# Allegro board laser_driver2.brd
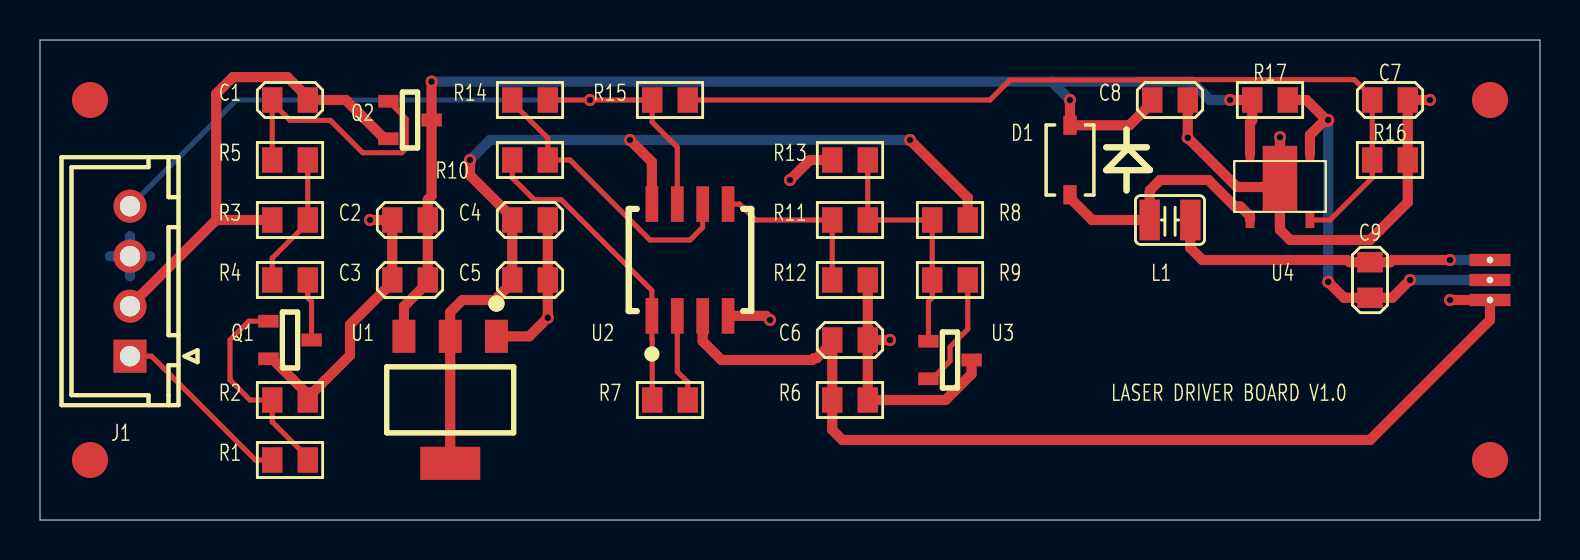
[diagram p0: board, top side]
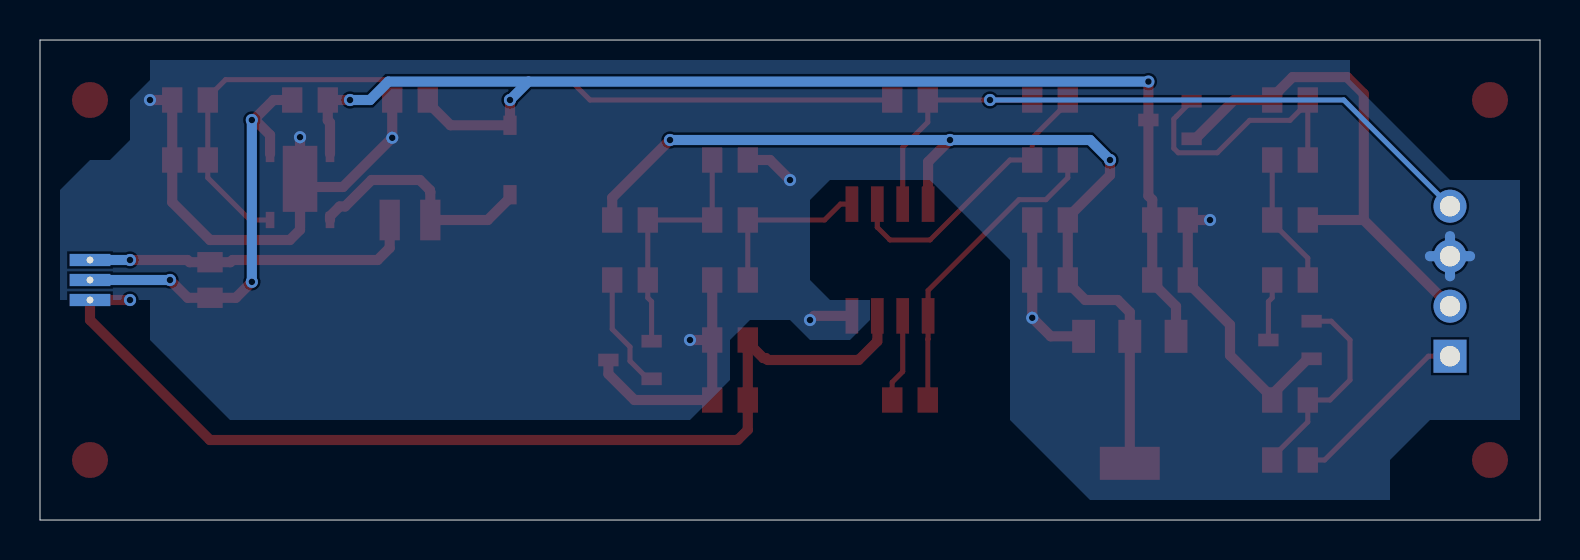
[diagram p1: board, bottom side, seen from below]

Outline 75 x 24 mm; copper layers: TOP, BOTTOM. Coordinates in mm from the lower left corner of the outline.
Outline path: 0,24 75,24 75,0 0,0 0,24

## Design rules (mm)
nets with their own width: min track width 0.508; nets 5V COM GND LD- PD+ VCC VIN

## Placement (name value [footprint] x y rotation side)
C1  0.1uF  [C0805]  12.5 21 180 top
C2  10uF  [C0805]  18.5 15 180 top
C3  0.1uF  [C0805]  18.5 12 180 top
C4  10uF  [C0805]  24.5 15 0 top
C5  0.1uF  [C0805]  24.5 12 0 top
C6  10pF  [C0805]  40.5 9 0 top
C7  0.1uF  [C0805]  67.5 21 0 top
C8  4.7uF  [C0805]  56.5 21 0 top
C9  1uF  [C0805]  66.5 12 270 top
D1  SS14  [SOD-123]  51.5 18 90 top
J1  HEADER 4  [WAFER1X4-2_54MM]  4.5 8.19 90 top
J2  HEADER 3  [LASER]  72.5 13 270 top
L1  27uH  [L1008]  56.5 15 0 top
NOREF  -  []  2.5 21 0 top
NOREF#2  -  []  72.5 21 0 top
NOREF#3  -  []  2.5 3 0 top
NOREF#4  -  []  72.5 3 0 top
Q1  MMBT3904  [SOT-23]  12.5 9 270 top
Q2  AO3401  [SOT-23]  18.5 20 270 top
R1  10K 1%  [R0805]  12.5 3 0 top
R2  10K 1%  [R0805]  12.5 6 0 top
R3  33K 1%  [R0805]  12.5 15 0 top
R4  6K8 1%  [R0805]  12.5 12 0 top
R5  100K 1%  [R0805]  12.5 18 180 top
R6  1M 1%  [R0805]  40.5 6 180 top
R7  0R  [R0805]  31.5 6 180 top
R8  250R 1%  [R0805]  45.5 15 180 top
R9  0R 1%  [R0805]  45.5 12 0 top
R10  10K 1%  [R0805]  24.5 18 0 top
R11  10K 1%  [R0805]  40.5 15 180 top
R12  10K 1%  [R0805]  40.5 12 0 top
R13  NC  [R0805]  40.5 18 180 top
R14  10K 1%  [R0805]  24.5 21 0 top
R15  1K 1%  [R0805]  31.5 21 0 top
R16  1M 1%  [R0805]  67.5 18 0 top
R17  1R 0.1%  [R0805]  61.5 21 0 top
U1  AMS1117-5  [SOT223]  20.5 6 180 top
U2  AD8606AR  [SOP8_244_0500_069]  32.5 13 90 top
U3  TL431ACDBZR  [SOT-23]  45.5 8 270 top
U4  MT7201C  [SOT89-5]  60.5 15 90 top

## Library data of the parts
C1-C9 = C_Generic
D1 = DIODE SCHOTTKY_0
J1 = HEADER 4: Tolerance: #TOL; User Part Number: HAMP
J2 = HEADER 3
L1 = L_2.2uH-1.48A_CMS
Q1 = NPN_0
Q2 = TM3401
R1-R16 = R_Generic: tolerance: 1%
R17 = R_Generic: tolerance: 0.1%
U1 = AS1117: Tolerance: #TOL; User Part Number: HAMP
U2 = AD8032ARZ
U3 = TL431
U4 = MT7201C

## Footprints (pads in the part's own frame, mm; a bottom-side part is the same pattern mirrored in y, then rotated)
C0805
  rect 1.016x1.27 smd: 1(-0.889,0) 2(0.889,0)
L1008
  rect 1.016x2.032 smd: 1(-1.016,0) 2(1.016,0)
LASER
  rect 0.61x2.032 hole 0.33: 1(0,0) 2(1,0) 3(2,0)
R0805
  rect 1.016x1.27 smd: 1(-0.889,0) 2(0.889,0)
SOD-123
  rect 0.965x0.66 smd: 1(1.738,0) 2(-1.738,0)
SOP8_244_0500_069
  rect 1.778x0.635 smd: 1(-2.794,1.905) 2(-2.794,0.635) 3(-2.794,-0.635) 4(-2.794,-1.905) 5(2.794,-1.905) 6(2.794,-0.635) 7(2.794,0.635) 8(2.794,1.905)
SOT89-5
  rect 0.813x0.432 smd: 1(0,0) 3(0,-2.997) 4(3.302,-2.997) 5(3.302,0)
  custom 4.115x1.727 smd: 2(1.651,-1.499)
SOT223
  rect 1.143x1.651 smd: 1(-2.321,-3.184) 2(-0.01,-3.184) 3(2.301,-3.184)
  rect 2.997x1.651 smd: 4(-0.01,3.166)
SOT-23
  rect 0.635x1.016 smd: 1(-0.94,-1.079) 2(0.94,-1.079) 3(0,1.079)
WAFER1X4-2_54MM
  rect 1.651x1.651 hole 1.016: 1(0,0)
  round 1.651 hole 1.016: 2(2.5,0) 3(5,0) 4(7.5,0)

## Nets
5V: C4.1 C5.1 R8.1 U1.2(OUT1) U1.4(OUT2) U2.8(+VS)
GND: C2.2 C3.2 C4.2 C5.2 C6.2 C7.2 C8.2 J1.3 Q1.2 R2.2 R6.1 R12.2 R13.2 R16.2 U1.1(ADJ/GND) U2.4(-VS) U3.3(ANODE) U4.2(GND)
VCC: C2.1 C3.1 C8.1 D1.1(ANODE) Q2.3(DRAIN) R17.1 U1.3(IN) U4.5(VIN)
VIN: C1.1 J1.2 Q2.2(SOURCE) R3.1
ADJ: J1.4 R14.2 R15.1 U2.7(OUT2)
COM: C9.2 J2.2 R17.2 U4.4(ISENSE)
EN: J1.1 R1.1
LD-: C9.1 J2.1 L1.2
PD+: C6.1 J2.3 R6.2 U2.3(+IN1)
VREF: R8.2 R9.1 R11.1 R13.1 U3.1(REF)
N00162: D1.2(CATHODE) L1.1 U4.1(LX)
N01015: C7.1 R15.2 R16.1 U4.3(ADJ)
N04030: R7.2 R10.1 U2.1(OUT1)
N04088: R7.1 U2.2(-N1)
N05077: R9.2 U3.2(CATHODE)
N05499: R10.2 R14.1 U2.6(-IN2)
N05583: R11.2 R12.1 U2.5(+IN2)
N08509: Q1.1 R1.2 R2.1
N08561: Q1.3 R4.2
N08565: R3.2 R4.1 R5.1
N13259: C1.2 Q2.1(GATE) R5.2

## Via types
v1: diameter 0.61, hole 0.33, TOP to BOTTOM, 20 vias

## Routing (per net, layer and track width the routed paths; a pad name or vN(x,y) marks a point on that pad's centre or on a via; arc(x,y) is an arc through that point)
5V: length 49.5
  TOP w0.508: U1.4 U1.2 20.51,10.39 21.12,11 22.74,11 23.61,11.87 C5.1 C4.1 23.61,15.13 21.5,17.24 v1(21.5,18) ; U2.8 30.59,17.91 v1(29.5,19) ; v1(43.5,19) 46.39,16.11 R8.1
  BOTTOM w0.508: v1(21.5,18) 22.5,19 v1(29.5,19) v1(43.5,19)
GND: length 70.6
  TOP w0.508: v1(69.5,21) C7.2 R16.2 68.39,15.89 66.5,14 62.51,14 62,14.51 U4.2 ; v1(37.5,17) 38.5,18 39.61,18 ; 41.39,9 41.39,6 45.28,6 46.58,7.3 U3.3 ; 41.39,9 v1(42.5,9) ; 41.39,9 41.39,12 ; v1(36.5,10) 36.29,10.21 34.41,10.21 ; C4.2 C5.2 v1(25.39,10.11) 24.46,9.18 U1.1 ; v1(16.5,15) C2.2 C3.2 17.61,11.87 15.5,9.76 15.5,8.24 13.39,6.13 ; 13.39,6.13 13.39,6.28 11.61,8.06 Q1.2 ; 13.39,6.13 R2.2 ; U4.2 59.85,16.65 v1(57.39,19.11) C8.2 ; U4.2 v1(62,19.14)
  BOTTOM w0.508: J1.3 5.5,13.19 ; J1.3 4.5,14.19 ; J1.3 4.5,12.19 ; J1.3 3.5,13.19
VCC: length 64.7
  TOP w0.508: U4.5 60.5,19.87 60.61,19.98 R17.1 v1(59.5,21) ; v1(51.5,21) D1.1 54.48,19.74 55.61,20.87 C8.1 ; v1(19.58,21.92) Q2.3 19.58,16.21 19.39,16.02 C2.1 C3.1 19.39,11.87 18.2,10.68 U1.3
  BOTTOM w0.508: 50.58,21.92 57.58,21.92 58.5,21 v1(59.5,21) ; 50.58,21.92 v1(51.5,21) ; 50.58,21.92 v1(19.58,21.92)
VIN: length 25.5
  TOP w0.508: R3.1 8.81,15 ; 8.81,15 J1.2 ; 8.81,15 8.81,21.31 9.64,22.14 12.37,22.14 13.39,21.13 C1.1 15.29,21 17.23,19.06 Q2.2
ADJ: length 36.1
  TOP w0.254: U2.7 31.87,18.63 30.61,19.89 R15.1 v1(27.5,21) R14.2
  BOTTOM w0.254: J1.4 9.81,21 v1(27.5,21)
COM: length 21.6
  TOP w0.508: U4.4 63.5,19.25 64.16,19.92 64.41,19.92 ; 64.41,19.92 v1(64.41,20) ; 64.41,19.92 63.32,21 R17.2 ; v1(68.5,12) 67.61,11.11 C9.2 65.2,11.11 v1(64.41,11.91)
  BOTTOM w0.508: v1(68.5,12) J2.2 ; v1(64.41,11.91) v1(64.41,20)
EN: length 9.3
  TOP w0.254: R1.1 10.77,3 5.58,8.19 J1.1
LD-: length 16.7
  TOP w0.508: v1(70.5,13) 67.63,13 67.52,12.89 C9.1 65.48,12.89 65.37,13 58.12,13 57.52,13.6 L1.2
  BOTTOM w0.508: J2.1 v1(70.5,13)
PD+: length 51.6
  TOP w0.508: 39.61,8.87 38.83,8.1 38.71,8.1 38.61,8 34.07,8 33.13,8.94 U2.3 ; 39.61,8.87 39.61,4.51 40.12,4 66.5,4 72.5,10 J2.3 v1(70.5,11) ; 39.61,8.87 39.61,9
VREF: length 12.4
  TOP w0.254: 41.39,18 41.39,15 R8.2 R9.1 44.61,11.11 44.42,10.92 U3.1
N00162: length 12.2
  TOP w0.508: U4.1 60.5,15.19 60.01,15.68 59.75,15.68 58.42,17 56.01,17 55.5,16.49 55.5,16.41 55.48,16.4 L1.1 52.61,15 51.5,16.11 D1.2
N01015: length 43
  TOP w0.254: R15.2 47.5,21 48.5,22 54.93,22 54.95,22.02 65.72,22.02 66.61,21.13 C7.1 R16.1 66.61,17.11 64.5,15 U4.3
N04030: length 15.7
  TOP w0.254: R10.1 23.61,17.11 24.71,16.02 26.05,16.02 30.59,11.48 U2.1 30.59,9.06 30.61,9.05 R7.2
N04088: length 4.4
  TOP w0.254: R7.1 32.39,6.89 31.87,7.41 U2.2
N05077: length 5.9
  TOP w0.254: R9.2 46.39,9.54 45.5,8.65 45.5,7.95 44.61,7.06 U3.2
N05499: length 14.6
  TOP w0.254: U2.6 33.13,14.63 32.5,14 30.5,14 26.5,18 R10.2 25.39,19.09 23.61,20.87 R14.1
N05583: length 8.5
  TOP w0.254: 39.61,12 39.61,15 35.77,15 34.98,15.79 34.41,15.79
N08509: length 10.6
  TOP w0.254: Q1.1 10.44,9.94 9.5,9 9.5,7 10.5,6 R2.1 11.61,4.91 13.39,3.13 R1.2
N08561: length 3.1
  TOP w0.254: Q1.3 13.58,10.92 13.39,11.11 R4.2
N08565: length 6.7
  TOP w0.254: R5.1 R3.2 13.39,14.87 11.61,13.1 R4.1
N13259: length 13.6
  TOP w0.254: 11.61,20.87 12.5,19.98 14.52,19.98 16.14,18.36 18.09,18.36 18.31,18.58 18.31,20.05 18.17,20.19 Q2.1 ; 11.61,20.87 C1.2 ; 11.61,20.87 R5.2

## Copper pours and planes (outline as drawn; the poured copper is in the pictures)
GND on BOTTOM: 1,5 1,17 4.5,17 9.5,22 9.5,23 69.5,23 69.5,22 70.5,21 70.5,19 71.5,18 72.5,18 74,16.5 74,11 69.5,11 69.5,9 65.5,5 42.5,5 40.5,7 40.5,9 39.5,10 37.5,10 36.5,9 34.5,9 33.5,10 33.5,11 35.5,11 36.5,12 36.5,16 35.5,17 30.5,17 26.5,13 26.5,5 22.5,1 7.5,1 7.5,3 5.5,5

Small or netless copper shapes (teardrops, artwork), in the pictures only: 4 on TOP

## Text on the board
Ref Des/Silkscreen Top: LASER DRIVER BOARD V1.0
DIMENSION: FIGURE | SIZE | 0.3302 | 1.016 | DRILL CHART: TOP to BOTTOM | ALL UNITS ARE IN MILLIMETERS | PLATED | QTY | 20 | 3 | 4
